# Altium PCB BKIT_Project.PcbDoc
Units mm, origin at the board's own origin, x right, y up, seen from the top; angles counter-clockwise.
Board outline 125 x 37 mm, 2 copper layers (Top Layer, Bottom Layer); 38 components, 32 nets, 154 pads, 28 vias.
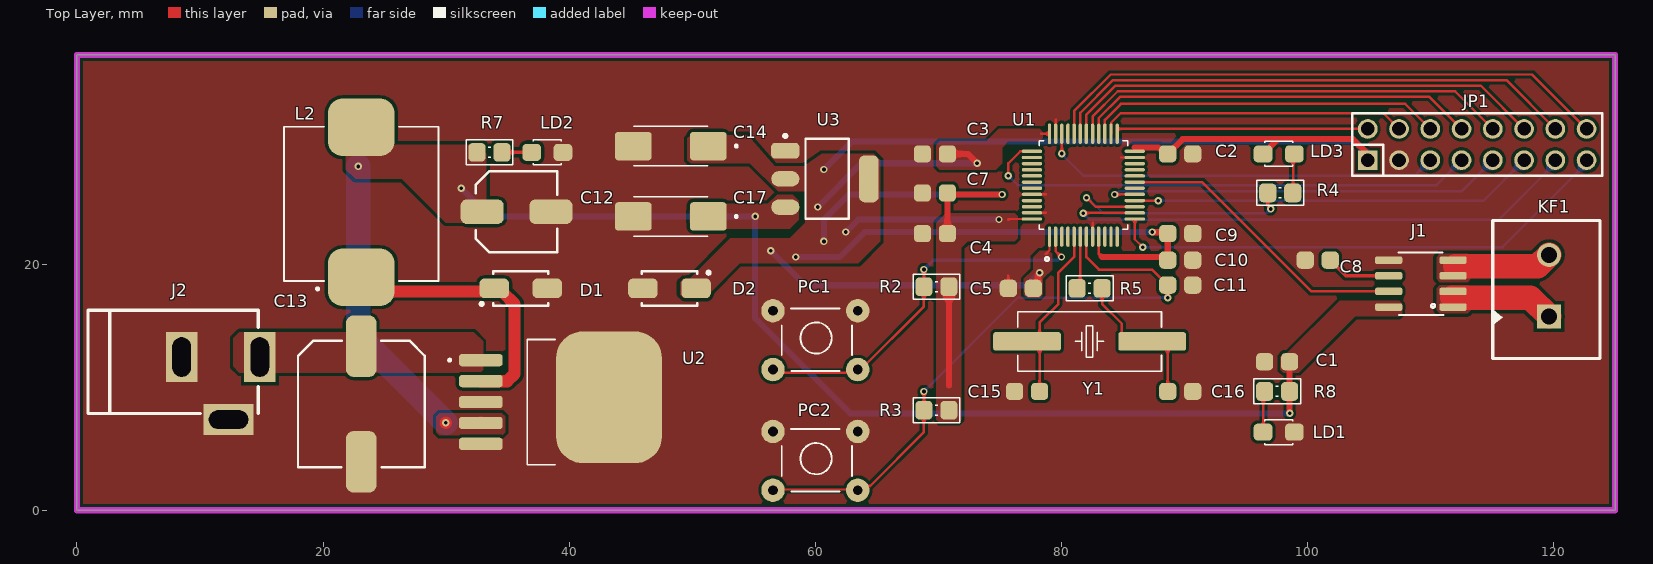
[diagram p0: Top Layer view]
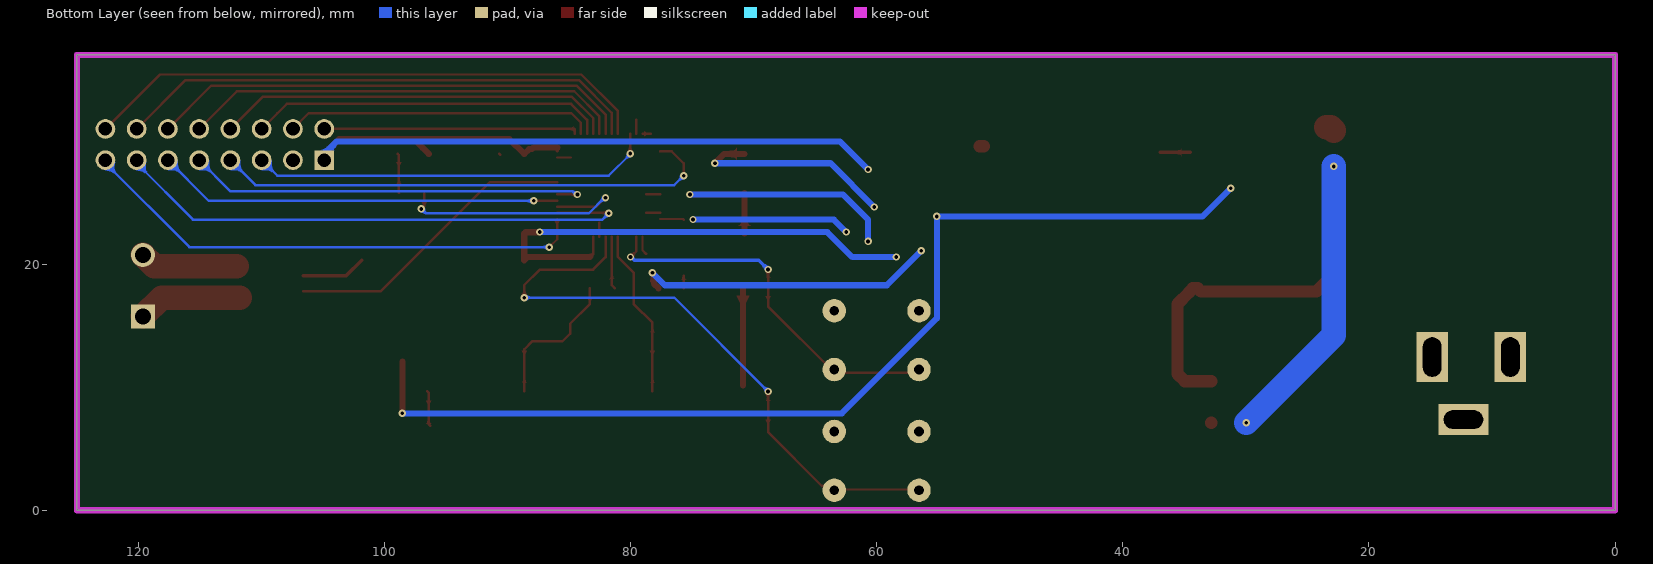
[diagram p1: Bottom Layer view, seen from below]
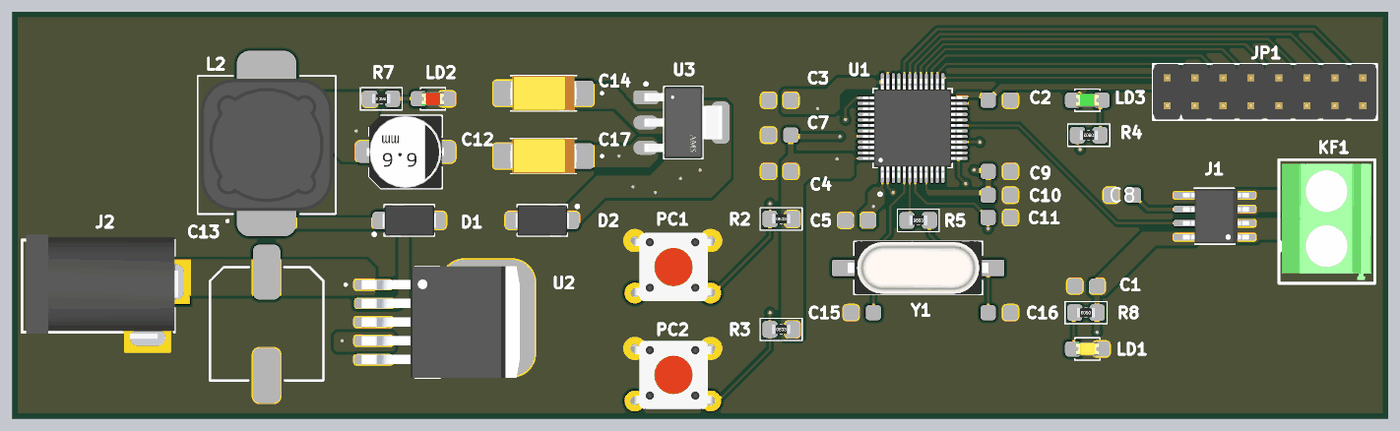
[diagram p2: 3D render of the assembled board from above, using the file's embedded part models]

## Layer stack, top to bottom
Top Solder: solder mask 0.0102, Solder Resist, Dk 3.5
Top Layer: signal copper 0.0356
Dielectric 1: dielectric 0.32, FR-4, Dk 4.8
Bottom Layer: signal copper 0.0356
Bottom Solder: solder mask 0.0102, Solder Resist, Dk 3.5

## Board outline
0,0 125,0 125,37 0,37

## Design rules (kind name [scope] priority, off if disabled: settings)
Clearance [All] p1: gap=0.254 ignorepadtopadclearanceinfootprint=FALSE except(0.15: SMDPad-SMDPad)
HoleSize [All] p1: absolutevalues=TRUE maxlimit=6.3 minlimit=0.15 maxpercent=80.000 minpercent=20.000
MinimumSolderMaskSliver MinimumSolderMaskSliver_1 [HasFootprint('QFP50P900X900X160-48N')] p1: minsoldermaskwidth=0
MinimumSolderMaskSliver [All] p2: minsoldermaskwidth=0.038
PolygonConnect [All] p1: connectstyle=Direct reliefconductorwidth=0.254 reliefentries=4 polygonreliefangle="90 Angle" airgapwidth=0.254
RoutingVias RoutingVias_1 [InNetClass('All Nets')] p1: holewidth=0.3 width=0.6 viastyle="Through Hole" minholewidth=0.3 minwidth=0.6 maxholewidth=0.3 maxwidth=0.6
SilkToSolderMaskClearance [IsPad] p1: minsilkscreentomaskgap=0.1 clearancetoexposedcopper=TRUE
SolderMaskExpansion [All] p1: expansion=0.102 istentingtop=FALSE
SupplyNets "Schematic Supply Nets_4" [InNet('GND')] p1: voltage=0.000
SupplyNets "Schematic Supply Nets_3" [InNet('12V')] p2: voltage=0.000
SupplyNets "Schematic Supply Nets_2" [InNet('3V3')] p3: voltage=0.000
SupplyNets "Schematic Supply Nets" [InNet('5V')] p4: voltage=0.000
Width Width_Power [InNetClass('Power')] p1: maxlimit=2 minlimit=0.2 preferedwidth=0.5
Width Width_Data [InNetClass('Data')] p2: maxlimit=0.3 minlimit=0.2 preferedwidth=0.3
Width [All] p3: maxlimit=0.254 minlimit=0.254 preferedwidth=0.254
27 further rules are at their usual default settings.

## Classes and differential pairs
net class Power: 3V3 5V 12V GND NetD1_2 NetJ1_1 NetJ1_3
net class Data: 7SEG_a 7SEG_A1 7SEG_A2 7SEG_A3 7SEG_A4 7SEG_b 7SEG_c 7SEG_d 7SEG_e 7SEG_f 7SEG_g 7SEG_h ADC_DATA NetC8_1 NetC15_2 NetC16_2 NetLD1_1 NetLD2_1 NetLD3_2 NetR5_1 PA5 PC13 RESET SWCLK SWDIO

## Components (designator, comment, footprint, x,y, rotation, side; value= is the part's Value field where it differs from the comment)
C1 "100nF" "CAP 0603" 97.536,12.065 r180 top
C2 "100nF" "CAP 0603" 89.662,28.956 r0 top
C3 "100nF" "CAP 0603" 69.723,28.956 r0 top
C4 "100nF" "CAP 0603" 69.723,22.479 r0 top
C5 "100nF" "CAP 0603" 76.708,18.034 r180 top
C7 "4.7uF" "CAP 0603" 69.723,25.781 r180 top
C8 "1nF" "CAP 0603" 100.838,20.32 r180 top
C9 "10nF" "CAP 0603" 89.662,22.479 r0 top
C10 "1uF" "CAP 0603" 89.662,20.32 r0 top
C11 "100nF" "CAP 0603" 89.662,18.288 r180 top
C12 "220uF" "CAP ALSMD 6.6MM H5.4MM" 35.727,24.257 r0 top
C13 "470uF" "CAP ALSMD ELEC 10.3MM H10.5MM LEADSPANMAX10.9MM" 23.114,8.636 r270 top
C14 "22uF" "CAP POL 6032_280" 48.26,29.591 r180 top
C15 "22pF" "CAP 0603" 77.216,9.652 r0 top
C16 "22pF" "CAP 0603" 89.662,9.652 r180 top
C17 "22uF_Tantalum_Capacitor" "CAP POL 6032_280" 48.26,23.876 r180 top
D1 "Diode Zener SS34" CAPMP4226X24N 36.068,18.034 r180 top
D2 "Diode Zener SS34" CAPMP4226X24N 48.159,18.034 r0 top
J1 "ACS712" SO08 109.22,18.415 r90 top
J2 "JACK_5V" "JACK DC 5.5" 11.684,9.906 r0 top
JP1 "2x8_JUMPER_STRAIGHT" "JP 2X8 DT" 113.792,29.718 r0 top
KF1 "Connector_2_pins" CON2_P196_1729128_TH_ST 119.634,15.748 r90 top
L2 "33uH" CDRH127 23.114,24.892 r90 top
LD1 "LED_YELLOW_0805" LED-0805-Yellow 96.52,6.35 r0 top
LD2 "LED_RED_0805" LED-0805-Red 37.084,29.083 r0 top
LD3 "LED_GREEN_0805" LED-0805-Green 96.52,28.956 r0 top
PC1 "Button 6x6" "Nut nhan 4 chan cam 6x6" 56.896,16.408 r0 top
PC2 "Button 6x6" "Nut nhan 4 chan cam 6x6" 56.896,6.604 r0 top
R2 "R_0603 1K" "TRO SMD 0603" 69.85,18.161 r0 top
R3 "R_0603 1K" "TRO SMD 0603" 69.85,8.128 r0 top
R4 "R_0603 1% 1R" "TRO SMD 0603" 97.79,25.781 r180 top
R5 "R_0603 1K" "TRO SMD 0603" 82.296,18.034 r0 top
R7 "R_0603 1% 1R" "TRO SMD 0603" 33.528,29.083 r180 top
R8 "R_0603 1% 1R" "TRO SMD 0603" 97.536,9.652 r180 top
U1 "STM32F103C8T6" QFP50P900X900X160-48N 81.788,26.416 r90 top
U2 "LM2596S-ADJ/NOPB" VREG_LM2596S-ADJ/NOPB 43.493,8.792 r0 top
U3 "AMS1117-3.3" FP-AMS1117-IPC_A 60.96,26.924 r0 top
Y1 "8MHz" "Thach Anh 2 Chan SMD" 82.296,13.716 r180 top

## Footprints (in the part's own frame and the unit in brackets; to place one, negate y for a bottom-side part, rotate by r counter-clockwise, add the part's x,y. Pads: shape width x height; smd on the part's side, far side on the other; paste and mask are expansions set on the pad)
"CAP 0603" [mil]
  rrect50% 55x55 smd: 1(-40,0) 2(40,0)
"CAP ALSMD 6.6MM H5.4MM" [mm] "Aluminum Electrolytic Capacitor, Body 6.60x6.60x5.40mm, IPC Low Density"
  rrect50% 3.5x2 smd: 1(-2.794,0) 2(2.794,0)
  silkscreen extent -3.3,-3.3 3.3,3.3, body extent -3.5,-3.3 3.5,3.3, height 5.4
"CAP ALSMD ELEC 10.3MM H10.5MM LEADSPANMAX10.9MM" [mm] "Aluminum SMD Electrolytic Capacitor, 10.30mm Land Size, 10.00mm Diameter, 10.50mm Height, 10.90mm Maximum Leads Span"
  rrect50% 5x2.5 smd: 1(-4.699,0) 2(4.699,0)
  silkscreen extent -5.15,-5.15 5.15,5.15, body extent -5.45,-5.15 5.45,5.15, height 10.5
"CAP POL 6032_280" [mm]
  rrect25% 3x2.32 smd: 1(-3.048,0) 2(3.048,0)
  silkscreen extent -5.42,-1.6 3,1.6, body extent -3,-1.6 3,1.6, height 2.8
CAPMP4226X24N [mm] "Molded Capacitor, 2-Leads, Body 4.25x2.60mm, IPC Medium Density"
  rrect50% 2.4x1.6 smd: 1(-2.159,0) 2(2.159,0)
  silkscreen extent -2.25,-1.4 3.3,1.4, body extent -2.47,-1.4 2.47,1.4, height 2.42
CDRH127 [mil]
  rrect50% 184x213 smd: 1(-235,0) 2(245,0)
  silkscreen extent -276,-247 247,247, body extent -236,-236 236,236, height 315
CON2_P196_1729128_TH_ST [mm] "Terminal Block"
  rect 1.95x1.95 / inner round 1.95 / far side rect 1.95x1.95 hole 1.3: 1(0,0)
  round 1.95 hole 1.3: 2(5,0)
  silkscreen extent -3.43,-4.14 7.8,4.57, body extent -3.13,-3.83 7.44,4.32, height 10.51
FP-AMS1117-IPC_A [mm]
  rrect50% 2.286x1.27 smd paste+0 mask+0: 1(-3.395,2.29)
  rrect100% 2.286x1.27 smd paste+0 mask+0: 2(-3.395,0) 3(-3.395,-2.29)
  rrect59% 1.604x3.81 smd paste+0 mask+0: 4(3.395,0)
  silkscreen extent -3.52,-3.25 1.75,3.62, body extent -4.7,-3.75 4.7,3.75, height 0.25
"JACK DC 5.5" [mm] "Jac DC input"
  rect 2.54x4.064 hole 1.5 slot 3.2 at 90 deg: 1(3.175,2.54) 2(-3.175,2.54)
  rect 4.064x2.54 hole 1.5 slot 3.2 at 0 deg: 3(0.635,-2.54)
  silkscreen extent -10.79,-2.03 3.05,6.35, body extent -10.42,-2.67 3.4,6.84, height 11.02
"JP 2X8 DT" [mm] "16 pins, dual pin, straight, gold plating"
  rect 1.6x1.6 hole 1.1: 1(-8.89,-1.27)
  round 1.6 hole 1.1: 2(-6.35,-1.27) 3(-3.81,-1.27) 4(-1.27,-1.27) 5(1.27,-1.27) 6(3.81,-1.27) 7(6.35,-1.27) 8(8.89,-1.27) 9(8.89,1.27) 10(6.35,1.27) 11(3.81,1.27) 12(1.27,1.27) 13(-1.27,1.27) 14(-3.81,1.27) 15(-6.35,1.27) 16(-8.89,1.27)
  silkscreen extent -10.16,-2.54 10.16,2.54, body extent -10.16,-2.54 10.16,2.54, height 8.55
LED-0805-Green [mil]
  rrect50% 60x55 smd: 1(-5,0) 2(95,0)
  silkscreen extent 0,-40 90,40, body extent 5,-25 85,25, height 43
LED-0805-Red [mil]
  rrect50% 60x55 smd: 1(-5,0) 2(95,0)
  silkscreen extent 0,-40 90,40, body extent 5,-25 85,25, height 43
LED-0805-Yellow [mil]
  rrect50% 60x55 smd: 1(-5,0) 2(95,0)
  silkscreen extent 0,-40 90,40, body extent 5,-25 85,25, height 43
"Nut nhan 4 chan cam 6x6" [mil] "SW button 4pin, 250 x250 mil"
  round 75 hole 31: 1(-13,-8) 1(258,-8) 2(-13,-196) 2(258,-196)
  silkscreen extent 15,-200 240,0, body extent -31,-225 281,19, height 276
QFP50P900X900X160-48N [mm]
  oval 1.651x0.28 smd: 1(-4.18,2.75) 2(-4.18,2.25) 3(-4.18,1.75) 4(-4.18,1.25) 5(-4.18,0.75) 6(-4.18,0.25) 7(-4.18,-0.25) 8(-4.18,-0.75) 9(-4.18,-1.25) 10(-4.18,-1.75) 11(-4.18,-2.25) 12(-4.18,-2.75) 25(4.18,-2.75) 26(4.18,-2.25) 27(4.18,-1.75) 28(4.18,-1.25) 29(4.18,-0.75) 30(4.18,-0.25) 31(4.18,0.25) 32(4.18,0.75) 33(4.18,1.25) 34(4.18,1.75) 35(4.18,2.25) 36(4.18,2.75)
  oval 0.28x1.651 smd: 13(-2.75,-4.18) 14(-2.25,-4.18) 15(-1.75,-4.18) 16(-1.25,-4.18) 17(-0.75,-4.18) 18(-0.25,-4.18) 19(0.25,-4.18) 20(0.75,-4.18) 21(1.25,-4.18) 22(1.75,-4.18) 23(2.25,-4.18) 24(2.75,-4.18) 37(2.75,4.18) 38(2.25,4.18) 39(1.75,4.18) 40(1.25,4.18) 41(0.75,4.18) 42(0.25,4.18) 43(-0.25,4.18) 44(-0.75,4.18) 45(-1.25,4.18) 46(-1.75,4.18) 47(-2.25,4.18) 48(-2.75,4.18)
  silkscreen extent -6.15,-3.6 3.6,3.6, body extent -4.5,-4.5 4.5,4.5, height 1.6
SO08 [mil]
  rrect50% 24x87 smd: 1(-75,-103) 2(-25,-103) 3(25,-103) 4(75,-103) 5(75,103) 6(25,103) 7(-25,103) 8(-75,103)
  silkscreen extent -100,-72 100,72, body extent -96,-123 96,113, height 69
"Thach Anh 2 Chan SMD" [mm] "SMD Crystal HC49/US-SM package"
  round 0.508 on Mech15: 0(0,0)
  rrect25% 5.5x1.5 smd: 1(-5.08,0) 2(5.08,0)
  silkscreen extent -5.84,-2.41 5.84,2.41, body extent -6.4,-2.41 6.4,2.42, height 4.29
"TRO SMD 0603" [mil] "Chip Capacitor, 2-Leads, Body 1,60x0,80mm, IPC Medium Density"
  rrect50% 55x60 smd mask+3: 1(-40,0) 2(40,0)
  silkscreen extent -75,-40 75,40, body extent -32,-16 32,17, height 17
VREG_LM2596S-ADJ/NOPB [mil]
  rrect50% 140x39.37 smd paste-1.97 mask+2.76: 1(-420,133.86) 2(-420,66.93) 3(-420,0) 4(-420,-66.93) 5(-420,-133.86)
  rrect50% 338.58x421.26 smd paste-1.97 mask+2.76: 6(-10,15)
  silkscreen extent -524,-200 -182,200, body extent -462,-200 102,200, height 183

## Part data
C1 C2 C3 C4 C5 C11: library part 100nF_0603_Ceramic_Capacitor
C7: library part 4.7uF_0603_Ceramic_Capacitor
C8: library part 1nF_0603_Ceramic_Capacitor
C9: library part 10nF_0603_Ceramic_Capacitor
C10: library part 1uF_0603_Ceramic_Capacitor
C12: library part 220uF_10V_Alumium_Capacitor
C13: library part 470uF_25V_Alumium_Capacitor
C14: library part 22uF_Tantalum_Capacitor
C15 C16: library part 22pF_50V_0603_Ceramic_Capacitor
J1: "Current Sensor 20A 1 Channel Hall Effect, Open Loop Bidirectional 8-SOIC (0.154, 3.90mm Width)", Package="PowerWFQFN-12 Allegro MicroSystems LLC", Check_prices=https://www.snapeda.com/parts/ACS712/Allegro+MicroSystems+LLC/view-part/?ref=eda, MF="Allegro MicroSystems", MP=ACS712, SnapEDA_Link=https://www.snapeda.com/parts/ACS712/Allegro+MicroSystems+LLC/view-part/?ref=snap
L2: library part 4.2A_33uH_CDRH127
R2 R3 R5: library part "R_0603 1% 1R"
U1: "ARM® Cortex®-M3 STM32F1 Microcontroller IC 32-Bit 72MHz 64KB (64K x 8) FLASH 48-LQFP (7x7)", Package="LQFP-48 STMicroelectronics", Check_prices=https://www.snapeda.com/parts/STM32F103C8T6/STMicroelectronics/view-part/?ref=eda, MF=STMicroelectronics, MP=STM32F103C8T6, SnapEDA_Link=https://www.snapeda.com/parts/STM32F103C8T6/STMicroelectronics/view-part/?ref=snap
U2: "SIMPLE SWITCHERÂ® 4.5V to 40V, 3A Low Component Count Step-Down Regulator", Package="TO-263-5 Texas Instruments", Check_prices=https://www.snapeda.com/parts/LM2596S-ADJ/NOPB/Texas+Instruments/view-part/?ref=eda, MF="Texas Instruments", MP=LM2596S-ADJ/NOPB, SnapEDA_Link=https://www.snapeda.com/parts/LM2596S-ADJ/NOPB/Texas+Instruments/view-part/?ref=snap
U3: library part CMP-209535-000001-1, "LDO Voltage Regulators 1A, 3.3V", Dropout Voltage=1.1V, Manufacturer="Advanced Monolithic Systems", Max Junction Temp=+125°C, Max Power Dissipation=1.2W, Max Supply Voltage=15V, Nominal Supply Current=5mA, Output Current=1A, Output Voltage=3.3V, Package=AMS1117, Temperature="-40°C to +125°C", Temperature Range Low=-40°C, Automotive=No, Category=IC, ComponentLink2Description=Datasheet, ComponentLink2URL=http://www.advanced-monolithic.com/pdf/ds1117.pdf, Device Class L1="Integrated Circuits (ICs)", Device Class L2="Power Management ICs", Device Class L3="Voltage Regulators - Linear", Height=1.8mm, Ipc Land Pattern Name=SOT229P700X180-4, Lead Free=Yes, Manufacturer Part Number=AMS1117-3.3, Number Of Outputs=1, Octopart=https://octopart.com/ams1117-3.3-advanced+monolithic+systems-25899300, Output Type=Fixed, RoHS=TRUE, Standoff Height=0.64mm, Temperature Range High=+125°C
Y1: library part 8MHz_Crystal_2p_SMD

## Via types
v1: diameter 0.6, hole 0.3, Top Layer to Bottom Layer, tented both sides, 28 vias

## Nets (pads, with @x,y where several pads share a name; then routed paths per layer and width w, separated by ;. In a path a pad name is that pad's centre, name@x,y a point inside that pad or via, vN(x,y) a via of type N, cw(c..) or ccw(c..) an arc to the next point about the centre after c; other vN are vias at no path point)
3V3: C2.1 C3.2 C4.2 C5.1 C7.1 C9.1 C10.1 C14.1 D2.2 JP1.1 LD3.1 R2.2 R3.2 U1.1 U1.9 U1.24 U1.36 U1.48 U3.2 U3.4 | length 200.5
  Top Layer w0.2: 75.692,23.622 75.736,23.666 U1.48 ; 78.348,30.596 U1.36 ; 78.74,20.828 79.038,21.126 U1.1 ; U1.9 83.038,20.848 83.312,20.574 ; U1.24 85.968,29.464
  Top Layer w0.5: C4.2 C7.1 70.866,25.654 v1(75.184,25.654) ; C3.2 72.39,28.956 v1(73.152,28.194) ; 70.866,10.16 R2.2 ; C5.1 78.111,18.421 78.111,19.156 78.232,19.277 v1(78.232,19.304) ; 83.312,20.574 88.392,20.574 C10.1 C9.1 88.538,22.587 87.395,22.587 v1(87.376,22.606) ; 85.968,29.464 87.905,29.464 88.025,29.343 88.259,29.343 C2.1 89.848,30.158 97.536,30.158 ; LD3.1 96.403,28.956 96.905,29.458 96.905,29.468 97.536,30.099 97.536,30.158 ; JP1.1@104.902,28.956 103.7,30.158 97.536,30.158
  Top Layer w1: C14.1 C14.1@51.648,29.591
  Bottom Layer w0.5: v1(56.388,21.082) 59.182,18.288 77.216,18.288 v1(78.232,19.304) ; v1(58.42,20.574) 61.976,20.574 64.008,22.606 v1(87.376,22.606) ; v1(60.198,24.638) 63.754,28.194 v1(73.152,28.194) ; v1(60.706,21.844) 60.706,23.622 62.738,25.654 v1(75.184,25.654) ; v1(60.706,27.686) 62.992,29.972 103.886,29.972 JP1.1@104.902,28.956 ; v1(62.484,22.606) 63.5,23.622 v1(74.93,23.622)
5V: C1.1 C12.1 C17.1 J1.8 L2.2 R7.2 R8.1 U2.4 U3.3 | length 108.5
  Top Layer w0.5: v1(98.552,7.874) C1.1
  Top Layer w1: v1(29.972,7.112) v1@29.982,7.102 ; U2.4@32.815,7.102 U2.4
  Top Layer w2: L2.2@22.86,30.861 L2.2 L2.2@23.482,31.115
  Bottom Layer w0.5: v1(31.242,26.162) 33.528,23.876 v1(55.118,23.876) 55.109,23.867 55.109,15.602 62.837,7.874 v1(98.552,7.874)
  Bottom Layer w2: v1(22.86,27.94) 22.86,14.224 v1(29.972,7.112)
7SEG_a: JP1.16 U1.25 | length 20.7
  Top Layer w0.2: U1.25 84.538,30.951 84.575,30.988 JP1.16
7SEG_A1: JP1.5 U1.17 | length 33.5
  Top Layer w0.2: v1(84.328,25.654) 84.334,25.66 85.962,25.66 U1.17
  Bottom Layer w0.2: v1(84.328,25.654) 84.436,25.654 84.69,25.908 112.522,25.908 JP1.5
7SEG_A2: JP1.6 U1.16 | length 33
  Top Layer w0.2: U1.16 85.974,25.16 87.87,25.16 v1(87.884,25.146)
  Bottom Layer w0.2: v1(87.884,25.146) 114.3,25.146 JP1.6
7SEG_A3: JP1.7 U1.14 | length 44.9
  Top Layer w0.2: v1(81.788,24.13) 81.818,24.16 85.962,24.16 U1.14
  Bottom Layer w0.2: v1(81.788,24.13) 82.296,23.622 115.57,23.622 120.142,28.194 JP1.7
7SEG_A4: JP1.8 U1.13 | length 41.7
  Top Layer w0.2: U1.13 85.968,22.024 v1(86.614,21.378)
  Bottom Layer w0.2: v1(86.614,21.378) 115.866,21.378 122.682,28.194 JP1.8
7SEG_b: JP1.15 U1.26 | length 25.1
  Top Layer w0.2: U1.26 84.044,30.602 84.044,31.486 84.816,32.258 106.172,32.258 JP1.15
7SEG_c: JP1.14 U1.27 | length 28.9
  Top Layer w0.2: U1.27 83.538,31.721 84.837,33.02 107.95,33.02 108.712,32.258 JP1.14
7SEG_d: JP1.13 U1.28 | length 32.5
  Top Layer w0.2: U1.28 83.038,31.864 84.769,33.595 109.915,33.595 JP1.13
7SEG_e: JP1.12 U1.29 | length 36
  Top Layer w0.2: U1.29 82.538,32.006 84.581,34.049 112.001,34.049 JP1.12
7SEG_f: JP1.11 U1.30 | length 39.5
  Top Layer w0.2: U1.30 82.038,32.148 84.393,34.503 114.087,34.503 JP1.11
7SEG_g: JP1.10 U1.31 | length 43
  Top Layer w0.2: U1.31 81.538,32.29 84.205,34.957 116.173,34.957 JP1.10
7SEG_h: JP1.9 U1.32 | length 46.5
  Top Layer w0.2: U1.32 81.038,32.432 84.017,35.411 118.259,35.411 JP1.9
12V: C13.1 J2.1 U2.1
ADC_DATA: J1.7 U1.19 | length 24.3
  Top Layer w0.2: U1.19 91.444,26.666 100.33,17.78 J1.7
GND: C1.2 C2.2 C3.1 C4.1 C5.2 C7.2 C8.2 C9.2 C10.2 C11.1 C12.2 C13.2 C14.2 C15.1 C16.1 C17.2 D1.1 D2.1 J1.5 J2.2 J2.3 JP1.2 LD1.2 LD2.2 PC1.1 PC2.1 U1.8 U1.23 U1.35 U1.44 U1.47 U2.3 U2.5 U2.6 U3.1 | length 6.7
  Top Layer w0.2: C5.2 75.692,19.05 ; U1.47 78.74,24.166 ; U1.44 78.74,25.666 ; U1.35 79.538,31.714 ; U1.8 82.538,23.356 ; 84.872,28.666 U1.23 ; C2.2@90.598,28.876 C2.2
NetC8_1: C8.1 J1.6 | length 5.3
  Top Layer w0.3: C8.1 103.124,19.05 J1.6
NetC15_2: C15.2 U1.5 Y1.2 | length 13.7
  Top Layer w0.2: C15.2 78.232,13.716 78.232,15.24 79.756,16.764 79.756,19.304 81.038,20.586 U1.5
NetC16_2: C16.2 R5.2 Y1.1 | length 12
  Top Layer w0.2: R5.2 83.312,16.764 84.914,15.162 84.914,14.359 85.557,13.716 88.003,13.716 88.646,13.073 C16.2
NetD1_2: D1.2 L2.1 U2.2 | length 22.2
  Top Layer w1: L2.1 24.257,17.78 33.655,17.78 D1.2 34.309,18.034 34.609,17.734 34.609,17.715 35.56,16.764 35.56,11.078 34.974,10.492 U2.2
NetJ1_1: J1.1 J1.2 KF1.1 | length 8.5
  Top Layer w2: 111.76,17.272 118.11,17.272 KF1.1
NetJ1_3: J1.3 J1.4 KF1.2 | length 8
  Top Layer w2: 112.014,19.812 118.698,19.812 KF1.2
NetLD1_1: LD1.1 R8.2 | length 2.9
  Top Layer w0.2: LD1.1@96.266,6.858 96.425,7.017 96.425,9.557 R8.2
NetLD2_1: LD2.1 R7.1 | length 2.4
  Top Layer w0.3: R7.1 LD2.1
NetLD3_2: LD3.2 R4.1 | length 3.2
  Top Layer w0.2: R4.1 98.838,25.813 98.838,28.861 LD3.2
NetR5_1: R5.1 U1.6 | length 4.3
  Top Layer w0.2: R5.1 81.534,18.288 81.534,22.232 U1.6
PA5: R4.2 U1.15 | length 21.3
  Top Layer w0.2: v1(82.042,25.4) 82.776,24.666 U1.15 ; R4.2 96.774,24.719 v1(97.008,24.485)
  Bottom Layer w0.2: v1(82.042,25.4) 82.127,25.4 83.397,24.13 96.652,24.13 v1(97.008,24.485)
PC13: PC1.2 R2.1 U1.2 | length 31.1
  Top Layer w0.2: PC1.2@56.566,11.43 56.82,11.176 63.449,11.176 68.834,16.561 R2.1 v1(68.834,19.558) ; U1.2 79.538,21.046 v1(80.01,20.574)
  Bottom Layer w0.3: v1(68.834,19.558) 69.596,20.32 79.684,20.32 79.938,20.574 v1(80.01,20.574)
RESET: C11.2 PC2.2 R3.1 U1.7 | length 50.8
  Top Layer w0.2: PC2.2@56.566,1.626 56.624,1.684 63.391,1.684 63.449,1.626 63.775,1.952 64.436,1.952 68.834,6.35 v1(68.834,9.652) ; U1.7 82.042,22.232 82.042,20.574 83.058,19.558 87.376,19.558 C11.2 v1(88.646,17.272)
  Bottom Layer w0.2: v1(68.834,9.652) 76.454,17.272 v1(88.646,17.272)
SWCLK: JP1.4 U1.37 | length 41.3
  Top Layer w0.2: v1(75.692,27.178) 75.692,28.194 76.658,29.16 77.602,29.16 U1.37
  Bottom Layer w0.2: v1(75.692,27.178) 76.454,26.416 110.49,26.416 JP1.4
SWDIO: JP1.3 U1.34 | length 32.9
  Top Layer w0.2: v1(80.038,28.984) U1.34
  Bottom Layer w0.2: v1(80.038,28.984) 80.038,28.928 81.788,27.178 108.712,27.178 JP1.3
pads on no net: U1.3 U1.4 U1.10 U1.11 U1.12 U1.18 U1.20 U1.21 U1.22 U1.33 U1.38 U1.39 U1.40 U1.41 U1.42 U1.43 U1.45 U1.46 Y1.0

## Polygon pours and split planes (outlines as drawn)
GND on Top Layer "GND_L01_P073" (solid, pour order 73): 0,0 0,37 125,37 125,0
12V on Top Layer "12V_L01_P000" (solid, pour order 0): 13.208,14.478 32.258,14.478 33.02,13.716 33.02,11.43 32.766,11.176 13.208,11.176 12.7,11.684 12.7,13.97
3V3 on Top Layer "3V3_L01_P040" (solid, pour order 40): 76.454,23.876 76.2,24.13 70.612,24.13 70.358,23.876 69.85,23.368 69.85,21.844 70.358,21.336 71.882,21.336 72.39,21.844 76.2,21.844 76.454,22.098
3V3 on Top Layer "3V3_L01_P065" (solid, pour order 65): 71.882,21.336 71.882,7.366 71.628,7.112 70.104,7.112 69.85,7.366 69.85,22.352
5V on Top Layer "5V_L01_P027" (solid, pour order 27): 33.274,28.956 32.766,29.718 22.352,29.718 21.844,29.21 21.844,27.686 22.606,26.924 26.416,26.924 29.972,23.368 32.512,23.368 33.274,24.13
NetJ1_1 on Top Layer "NETJ1_1_L01_P069" (solid, pour order 69): 113.03,18.288 113.284,18.034 113.284,16.256 113.03,16.002 110.744,16.002 110.49,16.256 110.49,18.034 110.744,18.288
NetJ1_3 on Top Layer "NETJ1_3_L01_P067" (solid, pour order 67): 113.03,20.828 113.284,20.574 113.284,18.796 113.03,18.542 110.744,18.542 110.49,18.796 110.49,20.574 110.744,20.828
5V on Top Layer "5V_L01_P066" (solid, pour order 66): 107.696,16.764 107.442,17.018 102.616,17.018 98.298,12.7 98.044,12.7 97.79,12.446 97.79,11.43 98.044,11.176 99.314,11.176 103.886,15.748 107.442,15.748 107.696,16.002
3V3 on Top Layer "3V3_L01_P061" (solid, pour order 61): 76.962,17.526 77.216,17.272 78.232,17.272 78.486,17.526 78.486,18.796 79.248,19.558 79.248,20.828 78.994,21.082 78.232,21.082 77.724,20.574 77.724,19.558 76.962,18.796
3V3 on Top Layer "3V3_L01_P042" (solid, pour order 42): 78.486,30.734 78.232,30.988 74.93,30.988 73.914,29.972 70.104,29.972 69.85,29.718 69.85,27.94 70.104,27.686 74.676,27.686 75.184,28.194 75.184,29.464 75.692,29.972 78.232,29.972 78.486,30.226
3V3 on Top Layer "3V3_L01_P030" (solid, pour order 30): 64.77,28.956 65.278,28.448 65.278,21.844 63.5,20.066 53.848,20.066 51.054,17.272 49.276,17.272 49.022,17.526 49.022,18.542 49.276,18.796 49.784,18.796 53.086,22.098 57.912,22.098 59.182,23.368 59.182,28.015 60.519,28.956
5V on Top Layer "5V_L01_P028" (solid, pour order 28): 50.292,24.892 49.784,24.384 49.784,23.368 50.292,22.86 57.912,22.86 58.674,23.622 58.674,25.146 58.166,25.654 56.896,25.654 56.134,24.892
3V3 on Top Layer "3V3_L01_P020" (solid, pour order 20): 64.834,28.702 65.105,28.34 65.105,26.497 64.516,25.908 58.755,25.908 56.977,25.908 54.691,28.194 49.865,28.194 49.611,28.448 49.611,30.226 49.865,30.48 54.529,30.48 56.723,27.94 62.992,27.94 63.754,28.702
5V on Top Layer "5V_L01_P003" (solid, pour order 3): 34.544,7.874 29.464,7.874 29.21,7.62 29.21,6.35 29.464,6.096 34.544,6.096 34.798,6.35 34.798,7.62

## Keep-outs
Keep-Out Layer:
  lines w0.254: -0.127,0 ccw(c0,0) 0,-0.127 ; -0.127,0 ccw(c0,0) 0,-0.127 ; -0.127,0 -0.127,37 ; -0.127,37 cw(c0,37) 0,37.127 ; -0.127,37 cw(c0,37) 0,37.127 ; 0,-0.127 125,-0.127 ; 0,37.127 125,37.127 ; 125,-0.127 ccw(c125,0) 125.127,0 ; 125,-0.127 ccw(c125,0) 125.127,0 ; 125,37.127 cw(c125,37) 125.127,37 ; 125,37.127 cw(c125,37) 125.127,37 ; 125.127,0 125.127,37 ; 0.127,0.127 0.127,36.873 124.873,36.873 124.873,0.127 0.127,0.127